# Altium PCB PCB1.PcbDoc (part 8 of 8)
Units mil, origin at the board's own origin, x right, y up, seen from the top; angles counter-clockwise.
Board outline 3820 x 2600 mil, 2 copper layers (Top Layer, Bottom Layer); 88 components, 130 nets, 566 pads, 113 vias.
Unrouted connection lines stored in the file: 16.
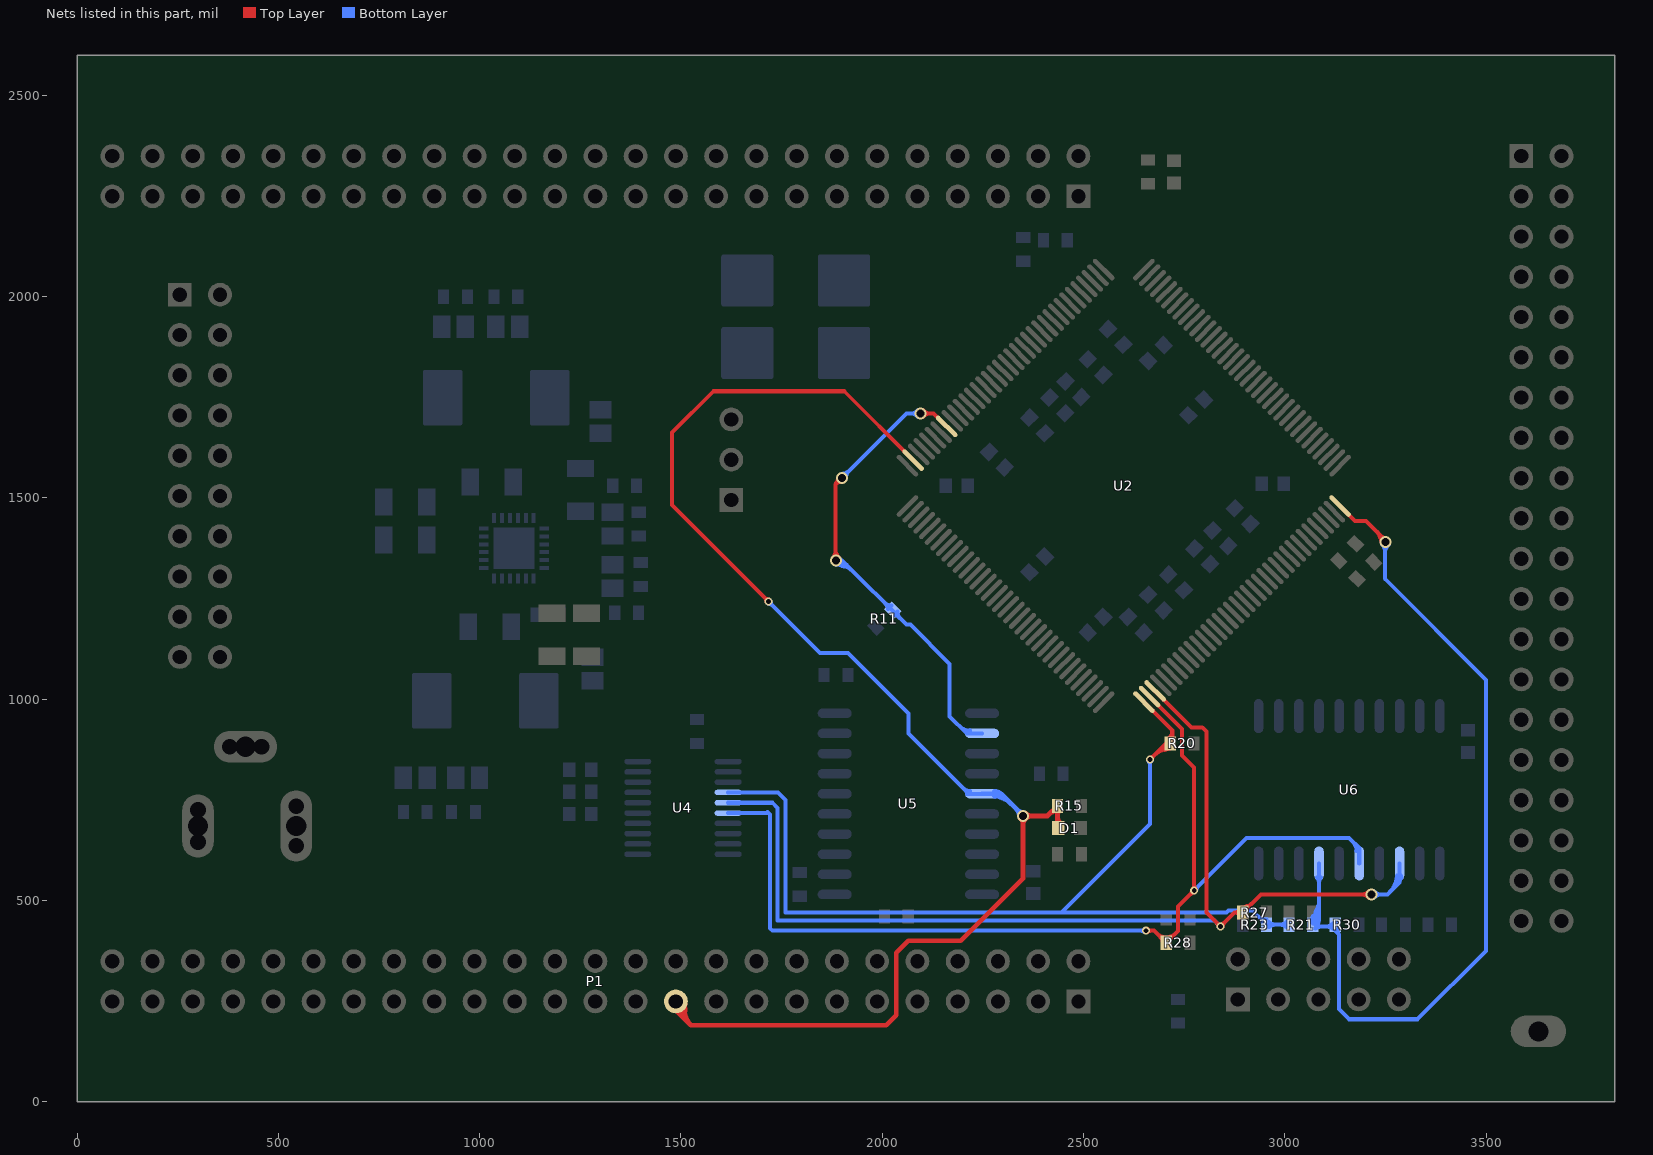
[diagram p8: the nets of this part, all layers, seen from the top]

## Via types
v1: diameter 30, hole 20, Top Layer to Bottom Layer, 74 vias
v2: diameter 20, hole 12, Top Layer to Bottom Layer, 36 vias
v3: diameter 17.72, hole 11.81, Top Layer to Bottom Layer, 3 vias

## Nets (pads, with @x,y where several pads share a name; then routed paths per layer and width w, separated by ;. In a path a pad name is that pad's centre, name@x,y a point inside that pad or via, vN(x,y) a via of type N, cw(c..) or ccw(c..) an arc to the next point about the centre after c; other vN are vias at no path point) (continued)
XDIN: R11.2 U2.65 U5.12 | length 2509.8
  Top Layer w10: v1(1885,1345) 1884,1346 1884,1534 ; v1(2095,1710) 2127.69,1710 U2.65@2160.15,1677.55 ; v1@1877.93,1352.07 ccw(c1863.27,1366.73) 1884,1366.73 ; v1@1877.93,1352.07 ccw(c1863.27,1366.73) 1884,1366.73 ; v1@1877.93,1352.07 ccw(c1863.27,1366.73) 1884,1366.73 ; 1884,1371.56 ccw(c1911.56,1371.56) v1@1892.07,1352.07 ; 1884,1371.56 ccw(c1911.56,1371.56) v1@1892.07,1352.07 ; 1884,1371.56 ccw(c1911.56,1371.56) v1@1892.07,1352.07 ; 1884,1534 cw(c1898.57,1519.44) v1@1899.53,1540.01 ; 1884,1534 ccw(c1869.44,1548.57) v1@1890.01,1549.53 ; 1884,1534 cw(c1898.57,1519.44) v1@1899.53,1540.01 ; 1884,1534 ccw(c1869.44,1548.57) v1@1890.01,1549.53 ; 1884,1534 ccw(c1869.44,1548.57) v1@1890.01,1549.53 ; 1884,1534 cw(c1898.57,1519.44) v1@1899.53,1540.01 ; 1884,1534 v1(1900,1550) ; 1885.58,1536.97 ccw(c1881.42,1556.07) v1(1900,1550) ; 1885.58,1536.97 ccw(c1881.42,1556.07) v1(1900,1550) ; 1885.58,1536.97 ccw(c1881.42,1556.07) v1(1900,1550) ; 1886.97,1535.58 cw(c1906.07,1531.42) v1(1900,1550) ; 1886.97,1535.58 cw(c1906.07,1531.42) v1(1900,1550) ; 1886.97,1535.58 cw(c1906.07,1531.42) v1(1900,1550) ; v1@2102.07,1702.93 cw(c2119.14,1685.86) 2119.14,1710 ; v1@2102.07,1702.93 cw(c2119.14,1685.86) 2119.14,1710 ; v1@2102.07,1702.93 cw(c2119.14,1685.86) 2119.14,1710 ; v1@2102.07,1717.07 ccw(c2119.14,1734.14) 2119.14,1710 ; v1@2102.07,1717.07 ccw(c2119.14,1734.14) 2119.14,1710 ; v1@2102.07,1717.07 ccw(c2119.14,1734.14) 2119.14,1710
  Bottom Layer w10: v1(1900,1550) 2060,1710 v1(2095,1710) ; U5.12@2248.07,915 2210,915 2167.5,957.5 2167.5,1087.5 2070,1185 2060,1185 1900,1345 v1(1885,1345) ; v1@1885,1335 cw(c1885,1274.64) 1927.68,1317.32 ; v1@1885,1335 cw(c1885,1274.64) 1927.68,1317.32 ; v1@1885,1335 cw(c1885,1274.64) 1927.68,1317.32 ; v1(1885,1345) cw(c1885,1308.79) 1910.61,1334.39 ; v1(1885,1345) ccw(c1913.56,1361.49) 1905.02,1329.63 ; v1(1885,1345) ccw(c1913.56,1361.49) 1905.02,1329.63 ; v1(1885,1345) cw(c1885,1308.79) 1910.61,1334.39 ; v1(1885,1345) ccw(c1913.56,1361.49) 1905.02,1329.63 ; v1(1885,1345) cw(c1885,1308.79) 1910.61,1334.39 ; v1@1891.58,1337.47 cw(c1899.85,1328.01) 1903.11,1340.15 ; v1@1891.58,1337.47 cw(c1899.85,1328.01) 1903.11,1340.15 ; v1@1891.58,1337.47 cw(c1899.85,1328.01) 1903.11,1340.15 ; v1@1894.46,1348.23 ccw(c1906.36,1352.29) 1903.11,1340.15 ; v1@1894.46,1348.23 ccw(c1906.36,1352.29) 1903.11,1340.15 ; v1@1894.46,1348.23 ccw(c1906.36,1352.29) 1903.11,1340.15 ; v1@1900,1560 ccw(c1900,1584.14) 1917.07,1567.07 ; v1@1900,1560 ccw(c1900,1584.14) 1917.07,1567.07 ; v1@1900,1560 ccw(c1900,1584.14) 1917.07,1567.07 ; v1@1910,1550 cw(c1934.14,1550) 1917.07,1567.07 ; v1@1910,1550 cw(c1934.14,1550) 1917.07,1567.07 ; v1@1910,1550 cw(c1934.14,1550) 1917.07,1567.07 ; 2005.11,1239.89 ccw(c2023.1,1257.88) R11.2@2023.1,1232.44 ; 2005.11,1239.89 ccw(c2023.1,1257.88) R11.2@2023.1,1232.44 ; 2005.11,1239.89 ccw(c2023.1,1257.88) R11.2@2023.1,1232.44 ; 2009.35,1235.65 cw(c1997.37,1223.66) R11.2@2014.32,1223.66 ; 2009.35,1235.65 cw(c1997.37,1223.66) R11.2@2014.32,1223.66 ; 2009.35,1235.65 cw(c1997.37,1223.66) R11.2@2014.32,1223.66 ; R11.2@2028.66,1209.32 cw(c2028.66,1192.37) 2040.65,1204.35 ; R11.2@2028.66,1209.32 cw(c2028.66,1192.37) 2040.65,1204.35 ; R11.2@2028.66,1209.32 cw(c2028.66,1192.37) 2040.65,1204.35 ; R11.2@2037.44,1218.1 ccw(c2062.88,1218.1) 2044.89,1200.11 ; R11.2@2037.44,1218.1 ccw(c2062.88,1218.1) 2044.89,1200.11 ; R11.2@2037.44,1218.1 ccw(c2062.88,1218.1) 2044.89,1200.11 ; 2070.86,1710 cw(c2070.86,1685.86) v1@2087.93,1702.93 ; 2070.86,1710 ccw(c2070.86,1734.14) v1@2087.93,1717.07 ; 2070.86,1710 cw(c2070.86,1685.86) v1@2087.93,1702.93 ; 2070.86,1710 ccw(c2070.86,1734.14) v1@2087.93,1717.07 ; 2070.86,1710 ccw(c2070.86,1734.14) v1@2087.93,1717.07 ; 2070.86,1710 cw(c2070.86,1685.86) v1@2087.93,1702.93 ; 2193.03,931.97 ccw(c2217.56,956.5) U5.12@2217.56,921.81 ; 2193.03,931.97 ccw(c2217.56,956.5) U5.12@2217.56,921.81 ; 2193.03,931.97 ccw(c2217.56,956.5) U5.12@2217.56,921.81
XDONE: D1.1 P1.21 R15.1 U2.71 U5.15 | length 5282.1
  Top Layer w10: v2(1717.5,1242.5) 1478,1482 1478,1662.04 1580.96,1765 1905.66,1765 U2.71@2076.63,1594.03 ; 1708.96,1251.04 cw(c1700.43,1242.5) v2@1712.5,1242.5 ; 1708.96,1251.04 ccw(c1717.5,1259.57) v2@1717.5,1247.5 ; 1708.96,1251.04 cw(c1700.43,1242.5) v2@1712.5,1242.5 ; 1708.96,1251.04 ccw(c1717.5,1259.57) v2@1717.5,1247.5 ; 1708.96,1251.04 ccw(c1717.5,1259.57) v2@1717.5,1247.5 ; 1708.96,1251.04 cw(c1700.43,1242.5) v2@1712.5,1242.5
  Top Layer w12: P1.21@1490,260 1490,225 1525,190 ; P1.21@1496.08,258.17 cw(c1463.04,224.07) 1510.51,224.82 ; 2035,250 2035,370 2065,400 2195,400 2350,555 v1(2350,710) 2410.47,710 R15.1@2435.47,735 2435.47,681.97 D1.1@2437.44,680 ; 2035,275 2035,215 2010,190 1525,190 ; 1525,190 cw(c1564.77,229.77) 1510.22,243.48 ccw(c1564.77,229.77) 1525,190 ; v1@2343.64,703.64 cw(c2328.27,688.27) 2350,688.27 ; v1@2343.64,703.64 cw(c2328.27,688.27) 2350,688.27 ; v1@2343.64,703.64 cw(c2328.27,688.27) 2350,688.27 ; 2350,688.27 cw(c2371.73,688.27) v1@2356.36,703.64 ; 2350,688.27 cw(c2371.73,688.27) v1@2356.36,703.64 ; 2350,688.27 cw(c2371.73,688.27) v1@2356.36,703.64 ; v1@2356.36,703.64 cw(c2371.73,688.27) 2371.73,710 ; v1@2356.36,703.64 cw(c2371.73,688.27) 2371.73,710 ; v1@2356.36,703.64 cw(c2371.73,688.27) 2371.73,710 ; v1@2356.36,716.36 ccw(c2371.73,731.73) 2371.73,710 ; v1@2356.36,716.36 ccw(c2371.73,731.73) 2371.73,710 ; v1@2356.36,716.36 ccw(c2371.73,731.73) 2371.73,710 ; 2415.47,715 cw(c2435.47,695) R15.1@2435.47,723.28 ; 2415.47,715 cw(c2435.47,695) R15.1@2435.47,723.28 ; 2415.47,715 cw(c2435.47,695) R15.1@2435.47,723.28 ; R15.1@2429.97,725.56 cw(c2416.69,712.28) 2435.47,712.28 ; R15.1@2429.97,725.56 cw(c2416.69,712.28) 2435.47,712.28 ; R15.1@2429.97,725.56 cw(c2416.69,712.28) 2435.47,712.28 ; D1.1@2430.55,688.86 ccw(c2418.66,700.75) 2435.47,700.75 ; D1.1@2430.55,688.86 ccw(c2418.66,700.75) 2435.47,700.75 ; D1.1@2430.55,688.86 ccw(c2418.66,700.75) 2435.47,700.75 ; 2435.47,710.26 ccw(c2465.73,710.26) D1.1@2444.33,688.86 ; 2435.47,710.26 ccw(c2465.73,710.26) D1.1@2444.33,688.86 ; 2435.47,710.26 ccw(c2465.73,710.26) D1.1@2444.33,688.86 ; 2435.47,712.28 cw(c2454.25,712.28) R15.1@2440.97,725.56 ; 2435.47,712.28 cw(c2454.25,712.28) R15.1@2440.97,725.56 ; 2435.47,712.28 cw(c2454.25,712.28) R15.1@2440.97,725.56 ; P1.21@1486.94,249.33 ccw(c1516.93,241.79) 1495.07,219.93 cw(c1516.93,241.79) P1.21@1486.94,249.33 ; P1.21@1498.58,246.4 ccw(c1540.85,235.78) 1510.03,204.97 cw(c1540.85,235.78) P1.21@1498.58,246.4
  Bottom Layer w10: v2(1717.5,1242.5) 1845,1115 1915,1115 2065,965 2065,915 2215,765 U5.15@2248.07,765 ; v2@1717.5,1237.5 cw(c1717.5,1225.43) 1726.04,1233.96 ; v2@1717.5,1237.5 cw(c1717.5,1225.43) 1726.04,1233.96 ; v2@1717.5,1237.5 cw(c1717.5,1225.43) 1726.04,1233.96 ; v2@1722.5,1242.5 ccw(c1734.57,1242.5) 1726.04,1233.96 ; v2@1722.5,1242.5 ccw(c1734.57,1242.5) 1726.04,1233.96 ; v2@1722.5,1242.5 ccw(c1734.57,1242.5) 1726.04,1233.96 ; 2201.56,778.44 ccw(c2217.56,794.43) U5.15@2217.56,771.81 ; 2201.56,778.44 ccw(c2217.56,794.43) U5.15@2217.56,771.81 ; 2201.56,778.44 ccw(c2217.56,794.43) U5.15@2217.56,771.81 ; 2207.74,772.26 cw(c2200.48,765) U5.15@2210.75,765 ; 2207.74,772.26 cw(c2200.48,765) U5.15@2210.75,765 ; 2207.74,772.26 cw(c2200.48,765) U5.15@2210.75,765
  Bottom Layer w12: U5.15@2248.07,765 2295,765 v1(2350,710) ; U5.15@2280.37,759.47 cw(c2285.03,745.02) 2295.76,755.76 ; U5.15@2278.58,759.19 cw(c2278.58,705.52) 2316.53,743.47 ; U5.15@2278.58,759.19 cw(c2278.58,705.52) 2316.53,743.47 ; U5.15@2278.58,759.19 cw(c2278.58,705.52) 2316.53,743.47 ; U5.15@2278.58,771.19 cw(c2278.58,746.49) 2296.04,763.96 ; U5.15@2278.58,771.19 cw(c2278.58,746.49) 2296.04,763.96 ; U5.15@2278.58,771.19 cw(c2278.58,746.49) 2296.04,763.96 ; U5.15@2282.69,760.89 cw(c2292.61,750.97) 2292.61,765 ; U5.15@2282.69,760.89 cw(c2292.61,750.97) 2292.61,765 ; U5.15@2282.69,760.89 cw(c2292.61,750.97) 2292.61,765 ; U5.15@2282.69,769.11 ccw(c2292.61,779.03) 2292.61,765 ; U5.15@2282.69,769.11 ccw(c2292.61,779.03) 2292.61,765 ; U5.15@2282.69,769.11 ccw(c2292.61,779.03) 2292.61,765 ; U5.15@2283.61,767.91 ccw(c2312.36,784.5) 2303.77,752.44 ; U5.15@2283.61,767.91 ccw(c2312.36,784.5) 2303.77,752.44 ; U5.15@2283.61,767.91 ccw(c2312.36,784.5) 2303.77,752.44 ; 2334.64,725.36 cw(c2319.27,710) v1@2341,710 ; 2334.64,725.36 ccw(c2350,740.73) v1@2350,719 ; 2334.63,725.37 ccw(c2349.76,740.15) v1@2349.93,719 ; 2334.63,725.37 cw(c2319.85,710.24) v1@2341,710.07 ; 2334.66,725.34 cw(c2319.32,710.02) v1@2341,710.01 ; 2334.63,725.37 ccw(c2349.99,740.7) v1@2350,719 ; 2334.63,725.37 cw(c2319.3,710.01) v1@2341,710 ; 2334.66,725.34 ccw(c2349.98,740.68) v1@2349.99,719 ; 2334.63,725.37 cw(c2319.85,710.24) v1@2341,710.07 ; 2334.63,725.37 ccw(c2349.76,740.15) v1@2349.93,719 ; 2334.64,725.36 cw(c2319.27,710) v1@2341,710 ; 2334.64,725.36 ccw(c2350,740.73) v1@2350,719 ; 2334.63,725.37 cw(c2319.85,710.24) v1@2341,710.07 ; 2334.63,725.37 ccw(c2349.76,740.15) v1@2349.93,719 ; 2334.64,725.36 ccw(c2350,740.73) v1@2350,719 ; 2334.64,725.36 cw(c2319.27,710) v1@2341,710 ; 2335.06,724.93 cw(c2320.14,710.35) v1@2341,710.1 ; 2335.07,724.94 ccw(c2349.65,739.86) v1@2349.9,719 ; 2335.07,724.94 ccw(c2349.65,739.86) v1@2349.9,719 ; 2335.06,724.93 cw(c2320.14,710.35) v1@2341,710.1 ; 2335.07,724.94 ccw(c2349.65,739.86) v1@2349.9,719 ; 2335.06,724.93 cw(c2320.14,710.35) v1@2341,710.1
XTCK: R28.1 U2.110 U4.6 U6.5 | length 3258.9
  Top Layer w10: v2(2655,425) 2675.47,425 R28.1@2705.47,395 2735,424.53 2735,485 v2(2775,525) 2775,830 2744.31,860.69 2744.31,926.35 U2.110@2664.03,1006.63 ; v2@2658.54,421.46 cw(c2667.07,412.93) 2667.07,425 ; v2@2658.54,421.46 cw(c2667.07,412.93) 2667.07,425 ; v2@2658.54,421.46 cw(c2667.07,412.93) 2667.07,425 ; v2@2658.54,428.54 ccw(c2667.07,437.07) 2667.07,425 ; v2@2658.54,428.54 ccw(c2667.07,437.07) 2667.07,425 ; v2@2658.54,428.54 ccw(c2667.07,437.07) 2667.07,425 ; 2683.76,416.71 ccw(c2705.47,438.42) R28.1@2705.47,407.72 ; 2683.76,416.71 ccw(c2705.47,438.42) R28.1@2705.47,407.72 ; 2683.76,416.71 ccw(c2705.47,438.42) R28.1@2705.47,407.72 ; R28.1@2693.27,407.2 cw(c2685,398.94) R28.1@2696.69,398.94 ; R28.1@2693.27,407.2 cw(c2685,398.94) R28.1@2696.69,398.94 ; R28.1@2693.27,407.2 cw(c2685,398.94) R28.1@2696.69,398.94 ; R28.1@2694.32,410.7 cw(c2689.66,393.32) R28.1@2706.62,399.35 ; R28.1@2694.32,410.7 cw(c2689.66,393.32) R28.1@2706.62,399.35 ; R28.1@2694.32,410.7 cw(c2689.66,393.32) R28.1@2706.62,399.35 ; R28.1@2704.32,399.35 cw(c2721.28,393.32) R28.1@2716.62,410.7 ; R28.1@2704.32,399.35 cw(c2721.28,393.32) R28.1@2716.62,410.7 ; R28.1@2704.32,399.35 cw(c2721.28,393.32) R28.1@2716.62,410.7 ; R28.1@2705.47,407.72 ccw(c2705.47,438.42) 2727.18,416.71 ; R28.1@2705.47,407.72 ccw(c2705.47,438.42) 2727.18,416.71 ; R28.1@2705.47,407.72 ccw(c2705.47,438.42) 2727.18,416.71 ; R28.1@2714.25,398.94 cw(c2725.94,398.94) R28.1@2717.68,407.2 ; R28.1@2714.25,398.94 cw(c2725.94,398.94) R28.1@2717.68,407.2 ; R28.1@2714.25,398.94 cw(c2725.94,398.94) R28.1@2717.68,407.2 ; 2766.46,516.46 cw(c2775,507.93) v2@2775,520 ; 2766.46,516.46 ccw(c2757.93,525) v2@2770,525 ; 2766.46,516.46 cw(c2775,507.93) v2@2775,520 ; 2766.46,516.46 ccw(c2757.93,525) v2@2770,525 ; 2766.46,516.46 ccw(c2757.93,525) v2@2770,525 ; 2766.46,516.46 cw(c2775,507.93) v2@2775,520 ; v2@2771.46,528.54 ccw(c2762.93,537.07) 2775,537.07 ; v2@2771.46,528.54 ccw(c2762.93,537.07) 2775,537.07 ; v2@2771.46,528.54 ccw(c2762.93,537.07) 2775,537.07 ; 2775,537.07 ccw(c2787.07,537.07) v2@2778.54,528.54 ; 2775,537.07 ccw(c2787.07,537.07) v2@2778.54,528.54 ; 2775,537.07 ccw(c2787.07,537.07) v2@2778.54,528.54
  Bottom Layer w10: U4.6@1617.2,717.2 1712.2,717.2 1715,720 1721,714 1721,431 1727,425 v2(2655,425) ; v2(2775,525) 2905,655 3160,655 3185,630 U6.5@3185,591.93 ; 2642.93,425 cw(c2642.93,412.93) v2@2651.46,421.46 ; 2642.93,425 ccw(c2642.93,437.07) v2@2651.46,428.54 ; 2642.93,425 cw(c2642.93,412.93) v2@2651.46,421.46 ; 2642.93,425 ccw(c2642.93,437.07) v2@2651.46,428.54 ; 2642.93,425 ccw(c2642.93,437.07) v2@2651.46,428.54 ; 2642.93,425 cw(c2642.93,412.93) v2@2651.46,421.46 ; v2@2775,530 ccw(c2775,542.07) 2783.54,533.54 ; v2@2775,530 ccw(c2775,542.07) 2783.54,533.54 ; v2@2775,530 ccw(c2775,542.07) 2783.54,533.54 ; v2@2780,525 cw(c2792.07,525) 2783.54,533.54 ; v2@2780,525 cw(c2792.07,525) 2783.54,533.54 ; v2@2780,525 cw(c2792.07,525) 2783.54,533.54 ; 3168.03,646.97 cw(c3143.5,622.44) U6.5@3178.19,622.44 ; 3168.03,646.97 cw(c3143.5,622.44) U6.5@3178.19,622.44 ; 3168.03,646.97 cw(c3143.5,622.44) U6.5@3178.19,622.44
XTDI: R21.2 R30.1 U2.144 U6.7 | length 3456.5
  Top Layer w10: U2.144@3137.29,1479.89 3174.88,1442.3 3202.23,1442.3 3250,1394.53 v1(3250,1390) ; 3229.73,1414.8 cw(c3204.93,1390) v1@3240,1390 ; 3229.73,1414.8 cw(c3204.93,1390) v1@3240,1390 ; 3229.73,1414.8 cw(c3204.93,1390) v1@3240,1390 ; 3235.9,1405.28 ccw(c3257.52,1411.08) v1(3250,1390) ; 3235.9,1405.28 ccw(c3257.52,1411.08) v1(3250,1390) ; 3235.9,1405.28 ccw(c3257.52,1411.08) v1(3250,1390) ; 3240.66,1403.87 ccw(c3250,1413.21) v1@3250,1400 ; 3240.66,1403.87 ccw(c3250,1413.21) v1@3250,1400 ; 3240.66,1403.87 ccw(c3250,1413.21) v1@3250,1400
  Bottom Layer w10: R21.2@3077.73,447.08 cw(c3088.65,451.26) 3082.8,461.39 ; U6.7@3085,591.93 3085,455 ; R30.1@3125.47,445 R30.1@3115.47,435 ; v1(3250,1390) 3249,1389 3249,1299.23 3500,1048.23 3500,375 3330,205 3160,205 3135,230 3135,415.47 ; R21.2@3063.32,450.15 ccw(c3010.98,502.49) 3085,502.49 ; R21.2@3063.32,450.15 ccw(c3010.98,502.49) 3085,502.49 ; R21.2@3063.32,450.15 ccw(c3010.98,502.49) 3085,502.49 ; R21.2@3067.26,452.42 ccw(c3060.73,476.78) 3082.57,464.17 ; R21.2@3067.26,452.42 ccw(c3060.73,476.78) 3082.57,464.17 ; R21.2@3067.26,452.42 ccw(c3060.73,476.78) 3082.57,464.17 ; R21.2@3068.39,443.49 cw(c3087.33,450.99) 3069.69,461.18 ; R21.2@3068.39,443.49 cw(c3087.33,450.99) 3069.69,461.18 ; R21.2@3068.39,443.49 cw(c3087.33,450.99) 3069.69,461.18 ; R21.2@3070.39,443.07 ccw(c3035.12,478.34) 3085,478.34 ; R21.2@3070.39,443.07 ccw(c3035.12,478.34) 3085,478.34 ; R21.2@3070.39,443.07 ccw(c3035.12,478.34) 3085,478.34 ; R21.2@3072.5,452.2 ccw(c3076.54,463.46) 3085,455 ; R21.2@3072.5,452.2 ccw(c3076.54,463.46) 3085,455 ; R21.2@3072.5,452.2 ccw(c3076.54,463.46) 3085,455 ; R21.2@3075.74,429.85 cw(c3088.16,417.43) 3088.16,435 ; R21.2@3075.74,429.85 cw(c3088.16,417.43) 3088.16,435 ; R21.2@3075.74,429.85 cw(c3088.16,417.43) 3088.16,435 ; R21.2@3075.74,442.27 ccw(c3093.29,459.82) 3093.29,435 ; R21.2@3075.74,442.27 ccw(c3093.29,459.82) 3093.29,435 ; R21.2@3075.74,442.27 ccw(c3093.29,459.82) 3093.29,435 ; R21.2@3077.46,436 ccw(c3059.26,454.2) 3085,454.2 ; R21.2@3077.46,436 ccw(c3059.26,454.2) 3085,454.2 ; R21.2@3077.46,436 ccw(c3059.26,454.2) 3085,454.2 ; R21.2@3077.69,447.17 cw(c3111.86,460.71) 3080.03,479.09 ; R21.2@3077.69,447.17 cw(c3111.86,460.71) 3080.03,479.09 ; R21.2@3077.69,447.17 cw(c3111.86,460.71) 3080.03,479.09 ; R21.2@3078.01,446.21 cw(c3094.59,450.65) 3079.72,459.24 ; R21.2@3078.01,446.21 cw(c3094.59,450.65) 3079.72,459.24 ; R21.2@3078.01,446.21 cw(c3094.59,450.65) 3079.72,459.24 ; R21.2@3078.31,443.94 cw(c3088.86,443.94) R21.2@3081.4,451.4 ; R21.2@3078.31,443.94 cw(c3088.86,443.94) R21.2@3081.4,451.4 ; R21.2@3078.31,443.94 cw(c3088.86,443.94) R21.2@3081.4,451.4 ; U6.7@3080.18,556.6 cw(c3068.56,544.97) 3085,544.97 ; U6.7@3080.18,556.6 cw(c3068.56,544.97) 3085,544.97 ; U6.7@3080.18,556.6 cw(c3068.56,544.97) 3085,544.97 ; 3085,455 3072.5,442.5 3080,435 R30.1@3115.47,435 ; 3085,544.97 cw(c3101.44,544.97) U6.7@3089.82,556.6 ; 3085,544.97 cw(c3101.44,544.97) U6.7@3089.82,556.6 ; 3085,544.97 cw(c3101.44,544.97) U6.7@3089.82,556.6 ; 3101.71,435 ccw(c3101.71,459.82) R30.1@3119.26,442.27 ; 3101.71,435 ccw(c3101.71,459.82) R30.1@3119.26,442.27 ; 3101.71,435 ccw(c3101.71,459.82) R30.1@3119.26,442.27 ; 3106.84,435 cw(c3106.84,417.43) R30.1@3119.26,429.85 ; 3106.84,435 cw(c3106.84,417.43) R30.1@3119.26,429.85 ; 3106.84,435 cw(c3106.84,417.43) R30.1@3119.26,429.85 ; R30.1@3115.47,435 3135,415.47 ; R30.1@3133.01,431.56 ccw(c3144.32,424.79) 3135,415.47 ; R30.1@3133.01,431.56 ccw(c3144.32,424.79) 3135,415.47 ; R30.1@3133.01,431.56 ccw(c3144.32,424.79) 3135,415.47 ; v1@3242.93,1382.93 cw(c3228.27,1368.27) 3249,1368.27 ; v1@3242.93,1382.93 cw(c3228.27,1368.27) 3249,1368.27 ; v1@3242.93,1382.93 cw(c3228.27,1368.27) 3249,1368.27 ; 3249,1363.44 cw(c3276.56,1363.44) v1@3257.07,1382.93 ; 3249,1363.44 cw(c3276.56,1363.44) v1@3257.07,1382.93 ; 3249,1363.44 cw(c3276.56,1363.44) v1@3257.07,1382.93
XTDO: R20.1 R21.1 R23.1 U2.109 U4.4 | length 3225.8
  Top Layer w10: U2.109@2650.11,992.71 2720.47,922.35 ; v2(2665,850) 2705,890 R20.1@2715.47,890 ; R20.1@2720.47,890 2720.47,922.35 ; v2@2665,855 ccw(c2665,867.07) 2673.54,858.54 ; v2@2665,855 ccw(c2665,867.07) 2673.54,858.54 ; v2@2665,855 ccw(c2665,867.07) 2673.54,858.54 ; v2@2670,850 cw(c2682.07,850) 2673.54,858.54 ; v2@2670,850 cw(c2682.07,850) 2673.54,858.54 ; v2@2670,850 cw(c2682.07,850) 2673.54,858.54 ; 2675.89,860.89 cw(c2715.47,821.3) R20.1@2715.47,877.28 ; 2675.89,860.89 cw(c2715.47,821.3) R20.1@2715.47,877.28 ; 2675.89,860.89 cw(c2715.47,821.3) R20.1@2715.47,877.28 ; 2692.96,877.96 cw(c2715.47,855.44) R20.1@2715.47,887.28 ; 2692.96,877.96 cw(c2715.47,855.44) R20.1@2715.47,887.28 ; 2692.96,877.96 cw(c2715.47,855.44) R20.1@2715.47,887.28 ; 2700.74,873.34 ccw(c2694.01,898.46) R20.1@2716.53,885.45 ; 2700.74,873.34 ccw(c2694.01,898.46) R20.1@2716.53,885.45 ; 2700.74,873.34 ccw(c2694.01,898.46) R20.1@2716.53,885.45 ; 2701.52,883.55 cw(c2703.13,877.54) R20.1@2708.25,881.07 ; 2701.52,883.55 ccw(c2699.42,891.41) R20.1@2707.14,888.84 ; 2701.52,883.55 cw(c2703.13,877.54) R20.1@2708.25,881.07 ; 2701.52,883.55 ccw(c2699.42,891.41) R20.1@2707.14,888.84 ; 2701.52,883.55 cw(c2703.13,877.54) R20.1@2708.25,881.07 ; 2701.52,883.55 ccw(c2699.42,891.41) R20.1@2707.14,888.84 ; R20.1@2710.04,900.83 ccw(c2693.07,922.35) 2720.47,922.35 ; R20.1@2710.04,900.83 ccw(c2693.07,922.35) 2720.47,922.35 ; R20.1@2710.04,900.83 ccw(c2693.07,922.35) 2720.47,922.35
  Bottom Layer w10: U4.4@1617.2,768.39 1741.61,768.39 1760,750 1760,470 2445,470 ; v2(2665,850) 2665,690 2445,470 ; R21.1@3010.47,440 R23.1@2954.53,440 2925,469.53 2925,475 2860,475 2855,470 2445,470 ; v2@2661.46,846.46 cw(c2652.93,837.93) 2665,837.93 ; v2@2661.46,846.46 cw(c2652.93,837.93) 2665,837.93 ; v2@2661.46,846.46 cw(c2652.93,837.93) 2665,837.93 ; 2665,837.93 cw(c2677.07,837.93) v2@2668.54,846.46 ; 2665,837.93 cw(c2677.07,837.93) v2@2668.54,846.46 ; 2665,837.93 cw(c2677.07,837.93) v2@2668.54,846.46 ; 2932.82,461.71 ccw(c2954.53,483.42) R23.1@2954.53,452.72 ; 2932.82,461.71 ccw(c2954.53,483.42) R23.1@2954.53,452.72 ; 2932.82,461.71 ccw(c2954.53,483.42) R23.1@2954.53,452.72 ; R23.1@2942.32,452.2 cw(c2934.06,443.94) R23.1@2945.75,443.94 ; R23.1@2942.32,452.2 cw(c2934.06,443.94) R23.1@2945.75,443.94 ; R23.1@2942.32,452.2 cw(c2934.06,443.94) R23.1@2945.75,443.94 ; R23.1@2943.38,455.7 cw(c2938.72,438.32) R23.1@2955.68,444.35 ; R23.1@2943.38,455.7 cw(c2938.72,438.32) R23.1@2955.68,444.35 ; R23.1@2943.38,455.7 cw(c2938.72,438.32) R23.1@2955.68,444.35 ; R23.1@2960.74,433.79 cw(c2975.72,418.8) 2975.72,440 ; R23.1@2960.74,433.79 cw(c2975.72,418.8) 2975.72,440 ; R23.1@2960.74,433.79 cw(c2975.72,418.8) 2975.72,440 ; R23.1@2960.74,446.21 ccw(c2975.72,461.2) 2975.72,440 ; R23.1@2960.74,446.21 ccw(c2975.72,461.2) 2975.72,440 ; R23.1@2960.74,446.21 ccw(c2975.72,461.2) 2975.72,440 ; 2989.28,440 cw(c2989.28,418.8) R21.1@3004.26,433.79 ; 2989.28,440 ccw(c2989.28,461.2) R21.1@3004.26,446.21 ; 2989.28,440 cw(c2989.28,418.8) R21.1@3004.26,433.79 ; 2989.28,440 ccw(c2989.28,461.2) R21.1@3004.26,446.21 ; 2989.28,440 ccw(c2989.28,461.2) R21.1@3004.26,446.21 ; 2989.28,440 cw(c2989.28,418.8) R21.1@3004.26,433.79
XTMS: R27.1 U2.111 U4.5 U6.3 | length 3760.9
  Top Layer w10: U2.111@2677.95,1020.55 2768.5,930 2795,930 2805,920 2805,470 v2(2840,435) 2875,470 ; v1(3215,515) 2940.47,515 R27.1@2895.47,470 2875,470 ; 2831.46,443.54 cw(c2822.93,435) v2@2835,435 ; 2831.46,443.54 ccw(c2840,452.07) v2@2840,440 ; 2831.46,443.54 cw(c2822.93,435) v2@2835,435 ; 2831.46,443.54 ccw(c2840,452.07) v2@2840,440 ; 2831.46,443.54 ccw(c2840,452.07) v2@2840,440 ; 2831.46,443.54 cw(c2822.93,435) v2@2835,435 ; v2@2840,440 ccw(c2840,452.07) 2848.54,443.54 ; v2@2840,440 ccw(c2840,452.07) 2848.54,443.54 ; v2@2840,440 ccw(c2840,452.07) 2848.54,443.54 ; v2@2845,435 cw(c2857.07,435) 2848.54,443.54 ; v2@2845,435 cw(c2857.07,435) 2848.54,443.54 ; v2@2845,435 cw(c2857.07,435) 2848.54,443.54 ; 2875,470 cw(c2875,450.52) R27.1@2889.11,463.95 ; 2875,470 ccw(c2875,489.48) R27.1@2889.11,476.05 ; 2875,470 cw(c2875,450.52) R27.1@2889.11,463.95 ; 2875,470 ccw(c2875,489.48) R27.1@2889.11,476.05 ; 2875,470 ccw(c2875,489.48) R27.1@2889.11,476.05 ; 2875,470 cw(c2875,450.52) R27.1@2889.11,463.95 ; R27.1@2894.32,474.35 cw(c2911.28,468.32) R27.1@2906.62,485.7 ; R27.1@2894.32,474.35 cw(c2911.28,468.32) R27.1@2906.62,485.7 ; R27.1@2894.32,474.35 cw(c2911.28,468.32) R27.1@2906.62,485.7 ; R27.1@2895.47,482.72 ccw(c2895.47,513.42) 2917.18,491.71 ; R27.1@2895.47,482.72 ccw(c2895.47,513.42) 2917.18,491.71 ; R27.1@2895.47,482.72 ccw(c2895.47,513.42) 2917.18,491.71 ; R27.1@2904.25,473.94 cw(c2915.94,473.94) R27.1@2907.68,482.2 ; R27.1@2904.25,473.94 cw(c2915.94,473.94) R27.1@2907.68,482.2 ; R27.1@2904.25,473.94 cw(c2915.94,473.94) R27.1@2907.68,482.2 ; 3190.86,515 cw(c3190.86,490.86) v1@3207.93,507.93 ; 3190.86,515 ccw(c3190.86,539.14) v1@3207.93,522.07 ; 3190.86,515 cw(c3190.86,490.86) v1@3207.93,507.93 ; 3190.86,515 ccw(c3190.86,539.14) v1@3207.93,522.07 ; 3190.86,515 ccw(c3190.86,539.14) v1@3207.93,522.07 ; 3190.86,515 cw(c3190.86,490.86) v1@3207.93,507.93
  Bottom Layer w10: U4.5@1617.2,742.8 1727.2,742.8 1740,730 1740,450 2825,450 v2(2840,435) ; v1(3215,515) 3255,515 3285,545 ; 3274.17,541.28 ccw(c3261.58,553.86) U6.3@3278.52,559.33 ; U6.3@3285,591.93 3285,545 ; 2831.46,443.54 cw(c2822.93,435) v2@2835,435 ; 2831.46,443.54 ccw(c2840,452.07) v2@2840,440 ; 2831.46,443.54 cw(c2822.93,435) v2@2835,435 ; 2831.46,443.54 ccw(c2840,452.07) v2@2840,440 ; 2831.46,443.54 ccw(c2840,452.07) v2@2840,440 ; 2831.46,443.54 cw(c2822.93,435) v2@2835,435 ; v1@3222.07,507.93 cw(c3239.14,490.86) 3239.14,515 ; v1@3222.07,507.93 cw(c3239.14,490.86) 3239.14,515 ; v1@3222.07,507.93 cw(c3239.14,490.86) 3239.14,515 ; v1@3222.07,522.07 ccw(c3239.14,539.14) 3239.14,515 ; v1@3222.07,522.07 ccw(c3239.14,539.14) 3239.14,515 ; v1@3222.07,522.07 ccw(c3239.14,539.14) 3239.14,515 ; 3261.76,521.76 ccw(c3222.11,561.42) U6.3@3278.19,561.42 ; 3261.76,521.76 ccw(c3222.11,561.42) U6.3@3278.19,561.42 ; 3261.76,521.76 ccw(c3222.11,561.42) U6.3@3278.19,561.42 ; 3270.28,531.9 cw(c3307.86,521.83) U6.3@3288.41,555.52 ; 3270.28,531.9 cw(c3307.86,521.83) U6.3@3288.41,555.52 ; 3270.28,531.9 cw(c3307.86,521.83) U6.3@3288.41,555.52 ; 3278.83,538.83 ccw(c3256.25,561.42) U6.3@3288.19,561.42 ; 3278.83,538.83 ccw(c3256.25,561.42) U6.3@3288.19,561.42 ; 3278.83,538.83 ccw(c3256.25,561.42) U6.3@3288.19,561.42 ; U6.3@3280.19,556.6 cw(c3268.62,545) 3285,545 ; U6.3@3280.19,556.6 cw(c3268.62,545) 3285,545 ; U6.3@3280.19,556.6 cw(c3268.62,545) 3285,545 ; 3285,545 cw(c3301.38,545) U6.3@3289.81,556.6 ; 3285,545 cw(c3301.38,545) U6.3@3289.81,556.6 ; 3285,545 cw(c3301.38,545) U6.3@3289.81,556.6
pads on no net: P1.3 P1.4 P1.5 P1.6 P1.7 P1.8 P1.9 P1.11 P1.12 P1.14 P1.15 P1.16 P1.17 P1.18 P1.23 P1.24 P1.34 P1.35 P1.36 P1.45 P1.46 P1.47 P1.48 P2.3 P2.4 P2.5 P2.6 P2.7 P2.8 P2.9 P2.10 P2.11 P2.12 P2.13 P2.14 P2.15 P2.16 P2.19 P2.20 P2.21 P2.23 P2.25 P2.26 P2.28 P2.34 P2.35 P2.37 P2.38 P2.39 P2.40 P2.41 P2.42 P2.44 P2.45 P2.46 P2.47 P2.48 P4.3 P4.5 P4.7 P4.8 U2.1 U2.2 U2.32 U2.33 U2.35 U2.57 U2.112 U2.113 U2.140 U2.141 U3.1 U4.2 U4.9 U4.12 U4.13 U4.14 U4.15 U4.16 U6.4 U6.6 U6.8 U6.9 U6.11 U6.12 U6.14 U6.16

## Polygon pours and split planes (outlines as drawn)
+3.3V on Bottom Layer "Bottom Layer-5V" (solid, pour order 19): 1125,1880 1080,1880 1070,1870 1070,1675 1085,1660 1230,1660 1240,1670 1270,1700 1325,1700 1325,1750 1305,1770 1200,1875 1075,1875
NetL2_1 on Bottom Layer "Bottom Layer-5V" (solid, pour order 15): 975,1610 885,1610 840,1655 840,1825 850,1835 855,1840 1010,1840 1020,1830 1020,1655 1020,1585 1025,1580
+5V on Bottom Layer "Bottom Layer-5V" (solid, pour order 13): 450,755 450,610 510,550 580,550 635,605 635,845 620,860 555,860
+1.2V on Bottom Layer "Bottom Layer-5V" (solid, pour order 11): 1045,1075 1050,1070 1355,1070 1355,1035 1210,890 1045,890
NetL1_2 on Bottom Layer "Bottom Layer-5V" (solid, pour order 9): 995,1120 960,1085 830,1085 825,1080 825,935 840,920 845,915 1010,915 1010,1085 1010,1120
+5V on Bottom Layer "Bottom Layer-5V" (solid, pour order 7): 1130,1310 1140,1310 1150,1320 1150,1330 1180,1330 1195,1315 1210,1300 1260,1300 1275,1285 1275,1260 1275,1255 1270,1250 1210,1190 1185,1190 1180,1195 1175,1200 1175,1225 1175,1230 1130,1275
+5V on Bottom Layer "Bottom Layer-5V" (solid, pour order 4): 1285,1490 1280,1495 1265,1495 1240,1500 1230,1505 1210,1505 1190,1515 1180,1515 1170,1510 1165,1505 1160,1495 1160,1450 1150,1430 1150,1420 1175,1420 1200,1445 1285,1445
+5V on Bottom Layer "Bottom Layer-5V" (solid, pour order 6): 985,1275 970,1275 965,1270 960,1270 900,1330 895,1340 890,1355 890,1360 895,1365 910,1375 960,1375 965,1380 965,1390 960,1395 955,1395 945,1405 945,1410 940,1415 940,1430 950,1440 950,1455 965,1470 985,1470 1015,1440 1040,1440 1040,1470 995,1515 995,1570 960,1590 915,1590 890,1570 870,1550 845,1535 845,1400 790,1345 760,1335 735,1260 760,1265 835,1200 920,1185 980,1245
+5V on Bottom Layer "Bottom Layer-5V" (solid, pour order 2): 1000,1310 1040,1310 1040,1265 995,1220 995,1145 945,1145 940,1150 865,1185 829.58,1205.42 810,1230 940,1230 990,1285 995,1300

## Other copper
Top Layer:
  region net GND: 2225,1530 2592.5,1157.46 2970.07,1529.93 2602.57,1902.46

## Silkscreen, mask and mechanical layers (free items; w line width, h text height)
Top Overlay:
  text "DM v1.0 Aug 2012" at 200,65 h60
  text "GND" at 3555,45 h60

## Text inside footprints (layer, text, board x,y; h text height)
P1: Bottom Overlay "2" at 2587.4,329.21 h50; Bottom Overlay "1" at 2587.4,229.21 h50; Bottom Overlay "49" at 130,130 h50; Bottom Overlay "50" at 125,420 h50
P2: Bottom Overlay "2" at 2587.4,2329.21 h50; Bottom Overlay "1" at 2587.4,2229.21 h50; Bottom Overlay "49" at 145,2125 h50; Bottom Overlay "50" at 125,2430 h50
P3: Top Overlay "1" at 3567.4,2449.21 h50 r270; Top Overlay "2" at 3667.4,2449.21 h50 r270; Top Overlay "40" at 3667.4,369.21 h50 r270; Top Overlay "39" at 3567.4,369.21 h50 r270
P4: Top Overlay "10" at 3343.46,334.21 h50; Top Overlay "9" at 3343.46,234.21 h50; Top Overlay "1" at 2803.46,234.21 h50; Top Overlay "2" at 2803.46,334.21 h50
P5: Top Overlay "1" at 235,2085 h50 r270; Top Overlay "2" at 335,2085 h50 r270; Top Overlay "19" at 235,1045 h50 r270; Top Overlay "20" at 335,1045 h50 r270
U1: Mechanical 1 "*" at 1159.06,1263 h50 r270; Mechanical 1 "32" at 1085,1375 h50 r270; Bottom Overlay "*" at 1159.06,1263 h50 r270